# Altium PCB Ultrasonic_mbed.PcbDoc
Units mm, origin at the board's own origin, x right, y up, seen from the top; angles counter-clockwise.
Board outline 100 x 86.6 mm, 2 copper layers (Top Layer, Bottom Layer); 20 components, 28 nets, 116 pads, 0 vias.
Unrouted connection lines stored in the file: 1.
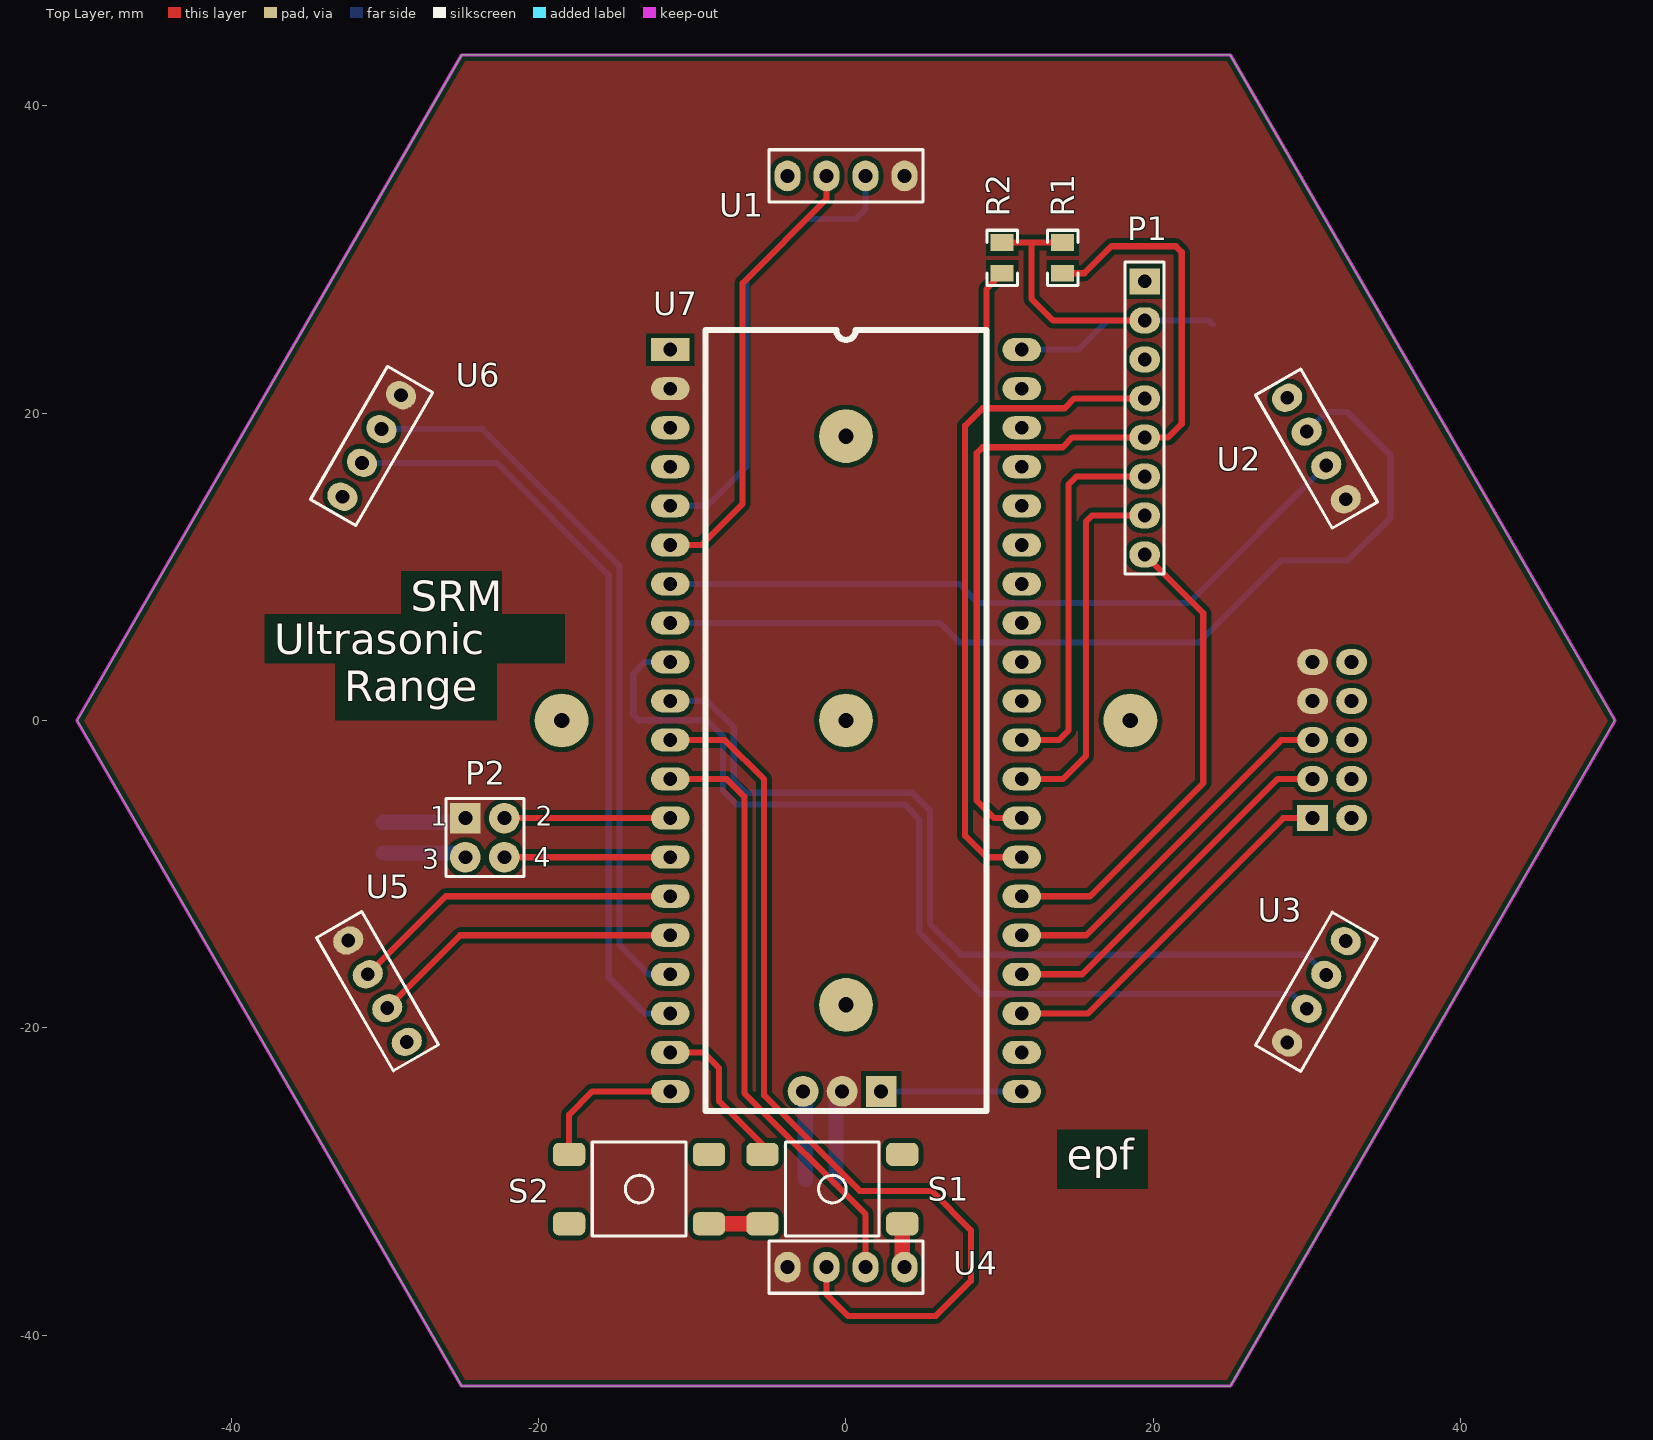
[diagram p0: Top Layer view]
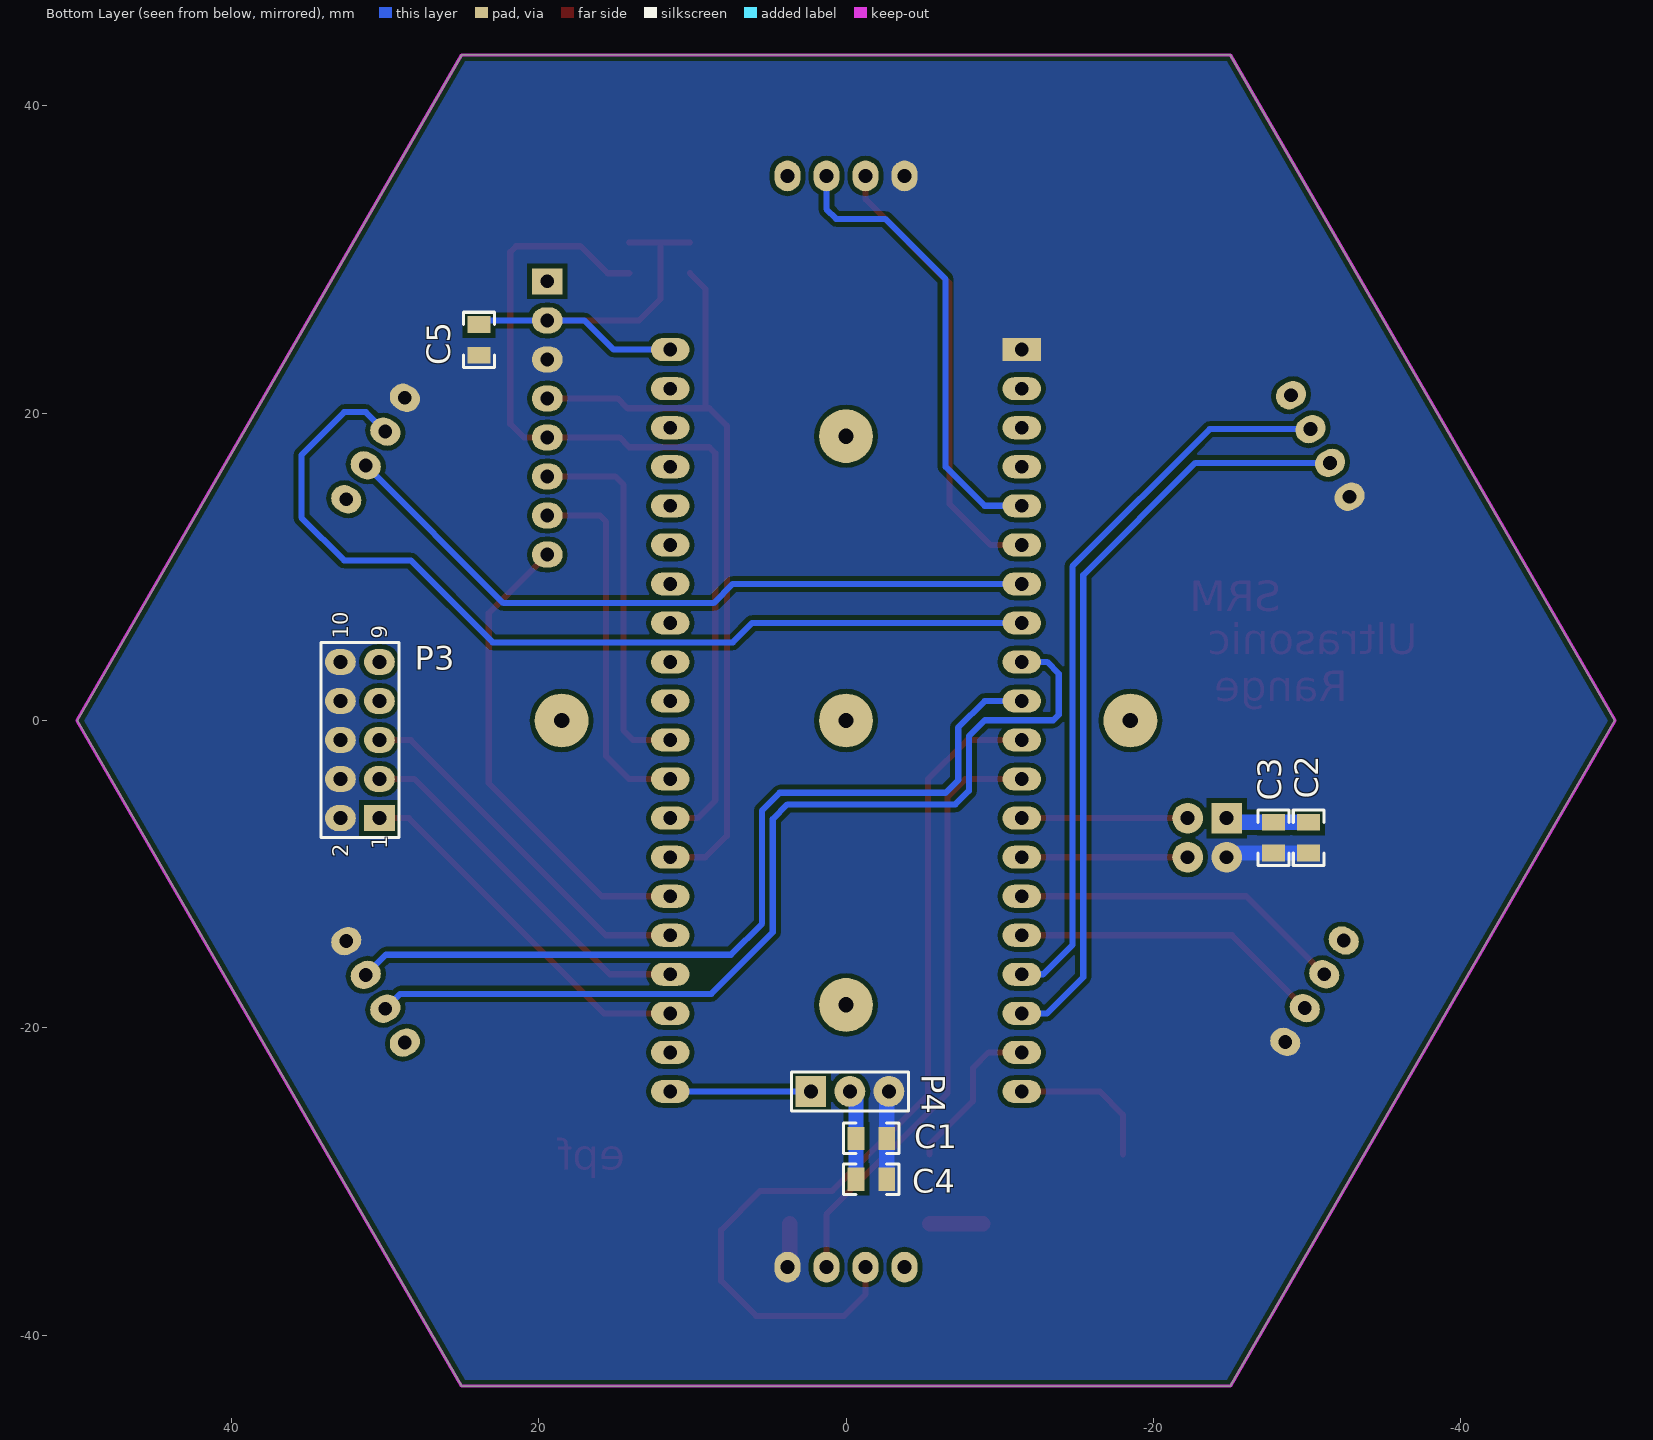
[diagram p1: Bottom Layer view, seen from below]

## Layer stack, top to bottom
Top Layer: signal copper 0.0356
Dielectric: dielectric 0.32, FR-4, Dk 4.8
Bottom Layer: signal copper 0.0356

## Board outline
25,-43.301 50,0 25,43.301 -25,43.301 -50,0 -25,-43.301

## Design rules (kind name [scope] priority, off if disabled: settings)
Clearance [All] p1: gap=0.3
MinimumAnnularRing [All] p1: minimumring=0.254
PolygonConnect [All] p1: connectstyle=Direct reliefconductorwidth=0.254 reliefentries=4 polygonreliefangle="90 Angle"
RoutingVias [All] p1: holewidth=0.8 width=1.5 viastyle="Through Hole" minholewidth=0.4 minwidth=0.9 maxholewidth=2 maxwidth=3
SilkscreenOverComponentPads [All] p1: minsilkscreentomaskgap=0.254
SolderMaskExpansion [All] p1: expansion=0.102
Width [All] p1: maxlimit=3 minlimit=0.3 preferedwidth=0.4
27 further rules are at their usual default settings.

## Components (designator, comment, footprint, x,y, rotation, side; value= is the part's Value field where it differs from the comment)
C1 "Capacitor" CAP0805 -1.651,-27.178 r0 bottom
C2 "Capacitor" CAP0805 -30.099,-7.62 r90 bottom
C3 "Capacitor" CAP0805 -27.813,-7.62 r90 bottom
C4 "Capacitor" CAP0805 -1.651,-29.845 r0 bottom
C5 "Capacitor" CAP0805 23.876,24.765 r90 bottom
P1 "Header 8" HDR1X8 19.431,28.575 r270 top
P2 "Header 2X2" HDR2X2 -24.765,-6.35 r270 top
P3 "NXT" HDR2X5 30.353,-6.35 r90 bottom
P4 "Servo" HDR1X3 2.286,-24.13 r180 bottom
R1 "Resistor" RES0805 14.097,30.099 r270 top
R2 "Resistor" RES0805 10.16,30.099 r270 top
S1 "SW-PB" "SW-PB6mm - 2" -0.889,-30.48 r0 top
S2 "SW-PB" "SW-PB6mm - 2" -13.462,-30.48 r0 top
U1 "HC-SR04" HC-SR04 3.81,35.433 r180 top
U2 "HC-SR04" HC-SR04 32.512,14.397 r120 top
U3 "HC-SR04" HC-SR04 28.702,-20.95 r60 top
U4 "HC-SR04" HC-SR04 -3.81,-35.56 r0 top
U5 "HC-SR04" HC-SR04 -32.385,-14.31 r300 top
U6 "HC-SR04" HC-SR04 -28.956,21.163 r240 top
U7 "mbed" mbed -11.43,24.13 r0 top

## Footprints (in the part's own frame and the unit in brackets; to place one, negate y for a bottom-side part, rotate by r counter-clockwise, add the part's x,y. Pads: shape width x height; smd on the part's side, far side on the other; paste and mask are expansions set on the pad)
CAP0805 [mm]
  rect 1.1x1.5 smd: 1(-1,0) 2(1,0)
  silkscreen extent -1.8,-1 1.8,1, body extent -1,-0.62 1,0.63, height 0.5
HC-SR04 [mm]
  oval 1.7x2 hole 0.9: 1(0,0) 2(2.54,0) 3(5.08,0) 4(7.62,0)
  silkscreen extent -1.19,-1.7 8.81,1.7, body extent -17.74,-15.82 25.26,0.18, height 21.13
HDR1X3 [mm] "Connector; Header; 3 Position"
  rect 2x2 hole 0.9: 1(0,0)
  round 2 hole 0.9: 2(2.54,0) 3(5.08,0)
  silkscreen extent -1.27,-1.27 6.35,1.27
HDR1X8 [mm] "Connector; Header; 8 Position"
  rect 1.7x2 hole 0.9: 1(0,0)
  oval 1.7x2 hole 0.9: 2(2.54,0) 3(5.08,0) 4(7.62,0) 5(10.16,0) 6(12.7,0) 7(15.24,0) 8(17.78,0)
  silkscreen extent -1.27,-1.27 19.05,1.27
HDR2X2 [mm] "Connector; Header; 2x2 Position"
  rect 2x2 hole 0.9: 1(0,0)
  round 2 hole 0.9: 2(0,2.54) 3(2.54,0) 4(2.54,2.54)
  silkscreen extent -1.27,-1.27 3.81,3.81
HDR2X5 [mm] "Connector; Header; 5x2 Position"
  rect 1.7x2 hole 0.9: 1(0,0)
  oval 1.7x2 hole 0.9: 2(0,2.54) 3(2.54,0) 4(2.54,2.54) 5(5.08,0) 6(5.08,2.54) 7(7.62,0) 8(7.62,2.54) 9(10.16,0) 10(10.16,2.54)
  silkscreen extent -1.27,-1.27 11.43,3.81, body extent -1.27,-1.27 11.41,3.81, height 8.55
mbed [mm]
  rect 2.5x1.5 hole 0.9: 1(0,0)
  oval 2.5x1.5 hole 0.9: 2(0,-2.54) 3(0,-5.08) 4(0,-7.62) 5(0,-10.16) 6(0,-12.7) 7(0,-15.24) 8(0,-17.78) 9(0,-20.32) 10(0,-22.86) 11(0,-25.4) 12(0,-27.94) 13(0,-30.48) 14(0,-33.02) 15(0,-35.56) 16(0,-38.1) 17(0,-40.64) 18(0,-43.18) 19(0,-45.72) 20(0,-48.26) 21(22.86,-48.26) 22(22.86,-45.72) 23(22.86,-43.18) 24(22.86,-40.64) 25(22.86,-38.1) 26(22.86,-35.56) 27(22.86,-33.02) 28(22.86,-30.48) 29(22.86,-27.94) 30(22.86,-25.4) 31(22.86,-22.86) 32(22.86,-20.32) 33(22.86,-17.78) 34(22.86,-15.24) 35(22.86,-12.7) 36(22.86,-10.16) 37(22.86,-7.62) 38(22.86,-5.08) 39(22.86,-2.54) 40(22.86,0)
  silkscreen extent 2.29,-49.53 20.57,1.27
RES0805 [mm]
  rect 1.1x1.5 smd: 1(-1,0) 2(1,0)
  silkscreen extent -1.8,-1 1.8,1, body extent -1,-0.62 1,0.63, height 0.5
"SW-PB6mm - 2" [mm]
  rrect50% 2.1x1.5 smd: 1(-4.55,2.26) 1(4.55,2.26) 2(-4.55,-2.26) 2(4.55,-2.26)
  silkscreen extent -3.05,-3.05 3.05,3.05, body extent -4.5,-3 4.5,3, height 5

## Part data
C1 C2 C3 C4 C5: library part Cap
P1: "Header, 8-Pin"
P2: "Header, 2-Pin, Dual row"
P3: library part "Header 5X2", "Header, 5-Pin, Dual row"
P4: library part "Header 3", "Header, 3-Pin"
R1 R2: library part Res
S1 S2: "Switch"
U1 U2 U3 U4 U5 U6: "Ultrasonic module"

## Free pads (board coordinates)
  round 3.5 hole 1: 1(-18.5,0) 1(0,-18.5) 1(0,0) 1(0,18.5) 1(18.5,0)

## Nets (pads, with @x,y where several pads share a name; then routed paths per layer and width w, separated by ;. In a path a pad name is that pad's centre, name@x,y a point inside that pad or via, vN(x,y) a via of type N, cw(c..) or ccw(c..) an arc to the next point about the centre after c; other vN are vias at no path point)
3V3: C5.2 P1.2 R1.1 R2.1 U7.40 | length 28.9
  Top Layer w0.4: R2.1 12.065,31.099 ; R1.1 12.065,31.099 ; P1.2 13.462,26.035 12.065,27.432 12.065,31.099
  Bottom Layer w0.4: U7.40 15.113,24.13 17.018,26.035 P1.2 23.606,26.035 C5.2
A_INT1: P1.7 U7.29 | length 24
  Top Layer w0.4: U7.29 14.097,-3.81 15.621,-2.286 15.621,12.954 16.002,13.335 P1.7
ECHO1: U1.3 U7.6 | length 29.4
  Top Layer w0.4: U7.6 -9.398,11.43 -6.731,14.097 -6.731,28.448 -1.27,33.909 U1.3
ECHO2: U2.3 U7.8 | length 62
  Bottom Layer w0.4: U7.8 6.096,6.35 7.366,5.08 22.987,5.08 28.321,10.414 32.639,10.414 35.433,13.208 35.433,17.272 32.639,20.066 31.242,20.066 U2.3
ECHO3: U3.3 U7.10 | length 56.4
  Bottom Layer w0.4: U7.10 -9.017,1.27 -7.301,-0.446 -7.301,-3.875 -6.477,-4.699 4.318,-4.699 5.461,-5.842 5.461,-13.208 7.493,-15.24 29.931,-15.24 U3.3
ECHO4: U4.3 U7.12 | length 39.2
  Top Layer w0.4: U7.12 -7.747,-3.81 -6.604,-4.953 -6.604,-24.257 1.27,-32.131 U4.3
ECHO5: U5.3 U7.16 | length 20.4
  Top Layer w0.4: U5.3 -25.105,-13.97 U7.16
ECHO6: U6.3 U7.18 | length 50.2
  Bottom Layer w0.4: U6.3 -22.733,16.764 -15.432,9.463 -15.432,-16.699 -13.081,-19.05 U7.18
G_INT: P1.8 U7.26 | length 31.3
  Top Layer w0.4: U7.26 15.875,-11.43 23.241,-4.064 23.241,6.985 P1.8
GND: C1.1 C2.1 C3.1 C4.1 C5.1 P1.3 P2.3 P3.2 P3.4 P3.6 P3.8 P3.10 P4.3 S1.2 S2.2@-8.912,-32.74 U1.4 U2.4 U3.4 U4.4 U5.4 U6.4 U7.1 | length 17.6
  Top Layer w1: S2.2@-8.912,-32.74 S1.2@-5.439,-32.74 ; S1.2@3.661,-32.74 3.661,-35.411 U4.4
  Bottom Layer w1: C2.1 C3.1 -25.035,-8.62 P2.3 ; P4.3 -2.651,-24.273 C1.1 C4.1
M_DRDY: P1.6 U7.30 | length 24.5
  Top Layer w0.4: U7.30 13.843,-1.27 14.478,-0.635 14.478,15.367 14.986,15.875 P1.6
NXT1: P3.1 U7.23 | length 24.2
  Top Layer w0.4: U7.23 15.748,-19.05 28.448,-6.35 P3.1
NXT2: P3.3 U7.24 | length 24.2
  Top Layer w0.4: U7.24 15.367,-16.51 28.067,-3.81 P3.3
NXT3: P3.5 U7.25 | length 24.2
  Top Layer w0.4: U7.25 15.621,-13.97 28.321,-1.27 P3.5
PB1: S1.1@-5.439,-28.22 U7.19 | length 10.4
  Top Layer w0.4: U7.19 -9.271,-21.59 -8.255,-22.606 -8.255,-24.765 -5.439,-27.581 S1.1@-5.439,-28.22
PB2: S2.1@-18.012,-28.22 U7.20 | length 9.8
  Top Layer w0.4: S2.1@-18.012,-28.22 -18.012,-25.632 -16.51,-24.13 U7.20
RX: P2.4 U7.14 | length 10.8
  Top Layer w0.4: P2.4 U7.14
SCL: P1.4 R2.2 U7.27 | length 52.6
  Top Layer w0.4: R2.2 9.144,28.083 9.144,20.32 ; U7.27 9.144,-8.89 7.747,-7.493 7.747,19.177 8.89,20.32 9.144,20.32 ; P1.4 14.859,20.955 14.224,20.32 9.144,20.32
SDA: P1.5 R1.2 U7.28 | length 59.9
  Top Layer w0.4: U7.28 9.652,-6.35 8.509,-5.207 8.509,17.399 8.89,17.78 14.097,17.78 14.732,18.415 P1.5 20.955,18.415 21.844,19.304 21.844,30.48 21.463,30.861 17.272,30.861 15.51,29.099 R1.2
SERVO1: P4.1 U7.21 | length 9.1
  Bottom Layer w0.4: P4.1 U7.21
TRIG1: U1.2 U7.5 | length 30
  Bottom Layer w0.4: U7.5 -9.017,13.97 -6.477,16.51 -6.477,28.702 -2.54,32.639 0.635,32.639 1.27,33.274 U1.2
TRIG2: U2.2 U7.7 | length 46.9
  Bottom Layer w0.4: U7.7 7.366,8.89 8.616,7.64 22.286,7.64 U2.2
TRIG3: U3.2 U7.9 | length 63.5
  Bottom Layer w0.4: U7.9 -13.081,3.81 -13.843,3.048 -13.843,0.381 -13.482,0.02 -9.037,0.02 -8.001,-1.016 -8.001,-4.572 -7.112,-5.461 3.81,-5.461 4.761,-6.412 4.761,-13.778 8.763,-17.78 29.002,-17.78 U3.2
TRIG4: U4.2 U7.11 | length 60.8
  Top Layer w0.4: U7.11 -7.874,-1.27 -5.334,-3.81 -5.334,-24.384 0.889,-30.607 5.588,-30.607 8.128,-33.147 8.128,-36.449 5.842,-38.735 0.127,-38.735 -1.27,-37.338 U4.2
TRIG5: U5.2 U7.15 | length 21.8
  Top Layer w0.4: U5.2 -26.035,-11.43 U7.15
TRIG6: U6.2 U7.17 | length 47.9
  Bottom Layer w0.4: U6.2 -23.663,18.964 -14.732,10.033 -14.732,-14.605 -12.827,-16.51 U7.17
TX: P2.2 U7.13 | length 10.8
  Top Layer w0.4: P2.2 U7.13
VCC: C1.2 C2.2 C3.2 C4.2 P2.1 P3.7 P3.9 P4.2 U1.1 U2.1 U3.1 U4.1 U5.1 U6.1 U7.2 | length 11.3
  Bottom Layer w1: C2.2 C3.2 -25.035,-6.62 P2.1 ; C4.2 C1.2 -0.651,-24.527 P4.2
pads on no net: P1.1 S1.1@3.661,-28.22 S2.1@-8.912,-28.22 S2.2@-18.012,-32.74 U7.3 U7.4 U7.22 U7.31 U7.32 U7.33 U7.34 U7.35 U7.36 U7.37 U7.38 U7.39

## Polygon pours and split planes (outlines as drawn)
VCC on Top Layer "VCC_TOP" (solid, remove dead copper, pour order 4): 25.019,-43.307 -25.019,-43.307 -50.038,0 -25.019,43.307 25.019,43.307 50.038,0
GND on Bottom Layer "GND_Bottom" (solid, remove dead copper, pour order 5): 25.019,-43.307 -25.019,-43.307 -50.038,0 -25.019,43.307 25.019,43.307 50.038,0

## Keep-outs
Keep-Out Layer:
  lines w0.2: -50.038,0 -25.019,-43.307 25.019,-43.307 50.038,0 25.019,43.307 -25.019,43.307 -50.038,0

## Other copper
Top Layer:
  text "SRM" at -28.321,7.112 h2
  text "Ultrasonic" at -37.211,4.318 h2
  text "Range" at -32.639,1.27 h2
  text "epf" at 14.351,-29.21 h2

## Silkscreen, mask and mechanical layers (free items; w line width, h text height)
Top Overlay:
  text "SRM" at -28.321,7.112 h2
  text "Ultrasonic" at -37.211,4.318 h2
  text "Range" at -32.639,1.27 h2
  text "epf" at 14.351,-29.21 h2
Borde:
  lines w0.2: -50.038,0 -25.019,-43.307 25.019,-43.307 50.038,0 25.019,43.307 -25.019,43.307 -50.038,0
Mechanical 13:
  lines w0.2: -43.334,-25.019 0,0 ; -43.334,25.019 0,0 ; 0,-50.038 0,0 ; 0,50.038 0,0 ; 43.334,-25.019 0,0 ; 43.334,25.019 0,0

## Text inside footprints (layer, text, board x,y; h text height)
P2: Top Overlay "3" at -27.559,-9.652 h1.27; Top Overlay "4" at -20.32,-9.525 h1.27; Top Overlay "2" at -20.193,-6.858 h1.27; Top Overlay "1" at -27.051,-6.858 h1.27
P3: Bottom Overlay "2" at 32.385,-8.89 h1 r270; Bottom Overlay "1" at 29.845,-8.382 h1 r270; Bottom Overlay "9" at 29.845,5.334 h1 r270; Bottom Overlay "10" at 32.385,5.334 h1 r270